# EAGLE board current-measurement (EAGLE 5.06)
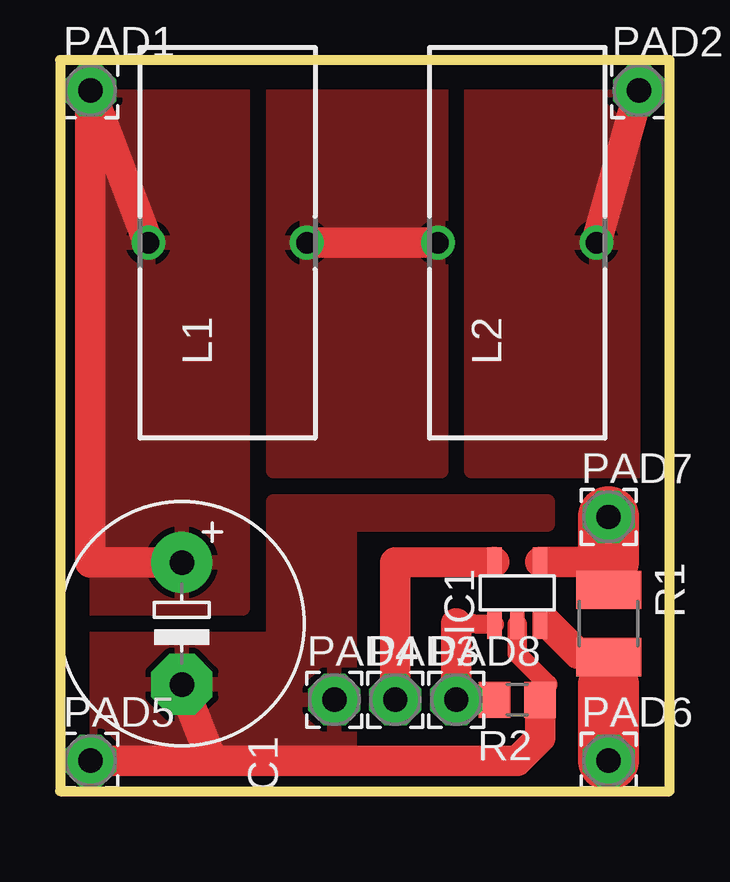
[diagram p0: board, top side]

Size 25.4 x 30.48 mm. Coordinates in mm from the lower left corner, seen from the top.
Outline: 0,0 25.4,0 25.4,30.48 0,30.48 0,0
Copper layers (1*16): Top 0.035mm / dielectric 1.5mm / Bottom 0.035mm
Design rules "default": minimum track width 10mil, minimum drill 24mil, track to track 8mil, track to pad 8mil, pad to pad 8mil, via to via 8mil, smd to smd 8mil, copper to edge 40mil, drill to drill 8mil, minimum pad ring 10mil, minimum via ring 8mil, stop-mask expansion 4mil, vias tented up to drill 0mil, thermal gap 10mil
Net classes: 1 thin: width 0.254 mm; 2 z: width 0.127 mm

## Footprints (pad centres in the part's own frame; a part is rotated, then mirrored left to right if it is on the bottom)
E5-10,5 = drill 1.016 pad 2.54 round: + -2.54,0 | drill 1.016 pad 2.54 octagon: - 2.54,0
SOT23-5 = smd 0.6 x 1.2: 1 -0.95,-1.306; 2 0,-1.306; 3 0.95,-1.306; 4 0.95,1.306; 5 -0.95,1.306
TJ3-U1 = drill 0.9 round: 1 -3.3,0; 2 3.3,0
2,15/1,0 = drill 1.016 pad 2.159 octagon: 1 0,0
R1210 = smd 1.6 x 2.7: 1 -1.4,0; 2 1.4,0
R0805 = smd 1.3 x 1.5: 1 -0.95,0; 2 0.95,0

## Placement (x,y rotation side)
C1  [E5-10,5]  5.08,6.99 270 top
IC1  INA138  [SOT23-5]  19.05,8.26 0 top
L1  [TJ3-U1]  6.99,22.86 0 top
L2  [TJ3-U1]  19.05,22.86 0 top
PAD1  WIREPAD2,15/1,0  [2,15/1,0]  1.27,29.21 0 top
PAD2  WIREPAD2,15/1,0  [2,15/1,0]  24.13,29.21 0 top
PAD3  WIREPAD2,15/1,0  [2,15/1,0]  13.97,3.81 0 top
PAD4  WIREPAD2,15/1,0  [2,15/1,0]  11.43,3.81 0 top
PAD5  WIREPAD2,15/1,0  [2,15/1,0]  1.27,1.27 0 top
PAD6  WIREPAD2,15/1,0  [2,15/1,0]  22.86,1.27 0 top
PAD7  WIREPAD2,15/1,0  [2,15/1,0]  22.86,11.43 0 top
PAD8  WIREPAD2,15/1,0  [2,15/1,0]  16.51,3.81 0 top
R1  0.005  [R1210]  22.86,6.99 270 top
R2  [R0805]  19.05,3.81 180 top

## Library data of the parts
C1 L1 L2 R1 R2 = rcl
IC1 = burr-brown
PAD1-PAD8 = wirepad

## Nets
GND: C1.- IC1.2 PAD4.1 PAD5.1 R2.1
IN: IC1.3 PAD6.1 R1.2
L_CENTER: L1.2 L2.1
L_IN: C1.+ L1.1 PAD1.1
L_OUT: L2.2 PAD2.1
OUT: IC1.4 PAD7.1 R1.1
SENSE: IC1.1 PAD8.1 R2.2
VCC: IC1.5 PAD3.1

## Tracks (layer width: path | path; a pad name or v marks a point on that pad's centre or on a via)
GND
  Top 0.813: IC1.2 19.05,5.71 20.32,4.45 R2.1
  Top 1.27: PAD5.1 6.35,1.27 | 6.35,1.27 19.05,1.27 20,2.22 R2.1 | 6.35,1.27 C1.-
  pour Top: 0,0 0,6.35 8.89,6.35 8.89,12.06 20.32,12.06 20.32,11.11 12.06,11.11 12.06,0
IN
  Top 0.61: 20.32,6.99 IC1.3 | 22.86,4.45 R1.2
  Top 1.27: 20.32,6.99 21.59,5.71 R1.2
  Top 2.54: PAD6.1 22.86,4.45
L_CENTER
  Top 1.27: L1.2 L2.1
  pour Top: 8.89,13.34 8.89,30.48 15.88,30.48 15.88,13.34
L_IN
  Top 1.27: C1.+ 1.27,9.53 PAD1.1 L1.1
  pour Top: 7.62,7.62 0,7.62 0,30.48 7.62,30.48
L_OUT
  Top 1.27: L2.2 PAD2.1
  pour Top: 25.4,13.34 17.14,13.34 17.14,30.48 25.4,30.48
OUT
  Top 1.27: R1.1 22.86,8.89 22.86,9.56 IC1.4
  Top 2.54: 22.86,9.56 PAD7.1
SENSE
  Top 0.813: 16.51,6.99 IC1.1
  Top 1.27: 16.51,6.99 PAD8.1 R2.2
VCC
  Top 1.27: IC1.5 13.97,9.53 PAD3.1